# Altium PCB ChronomePCBV2_2.PcbDoc (part 1 of 2)
Units mil, origin at the board's own origin, x right, y up, seen from the top; angles counter-clockwise.
Board outline 8860 x 8860 mil, 2 copper layers (Top Layer, Bottom Layer); 151 components, 169 nets, 789 pads, 304 vias.
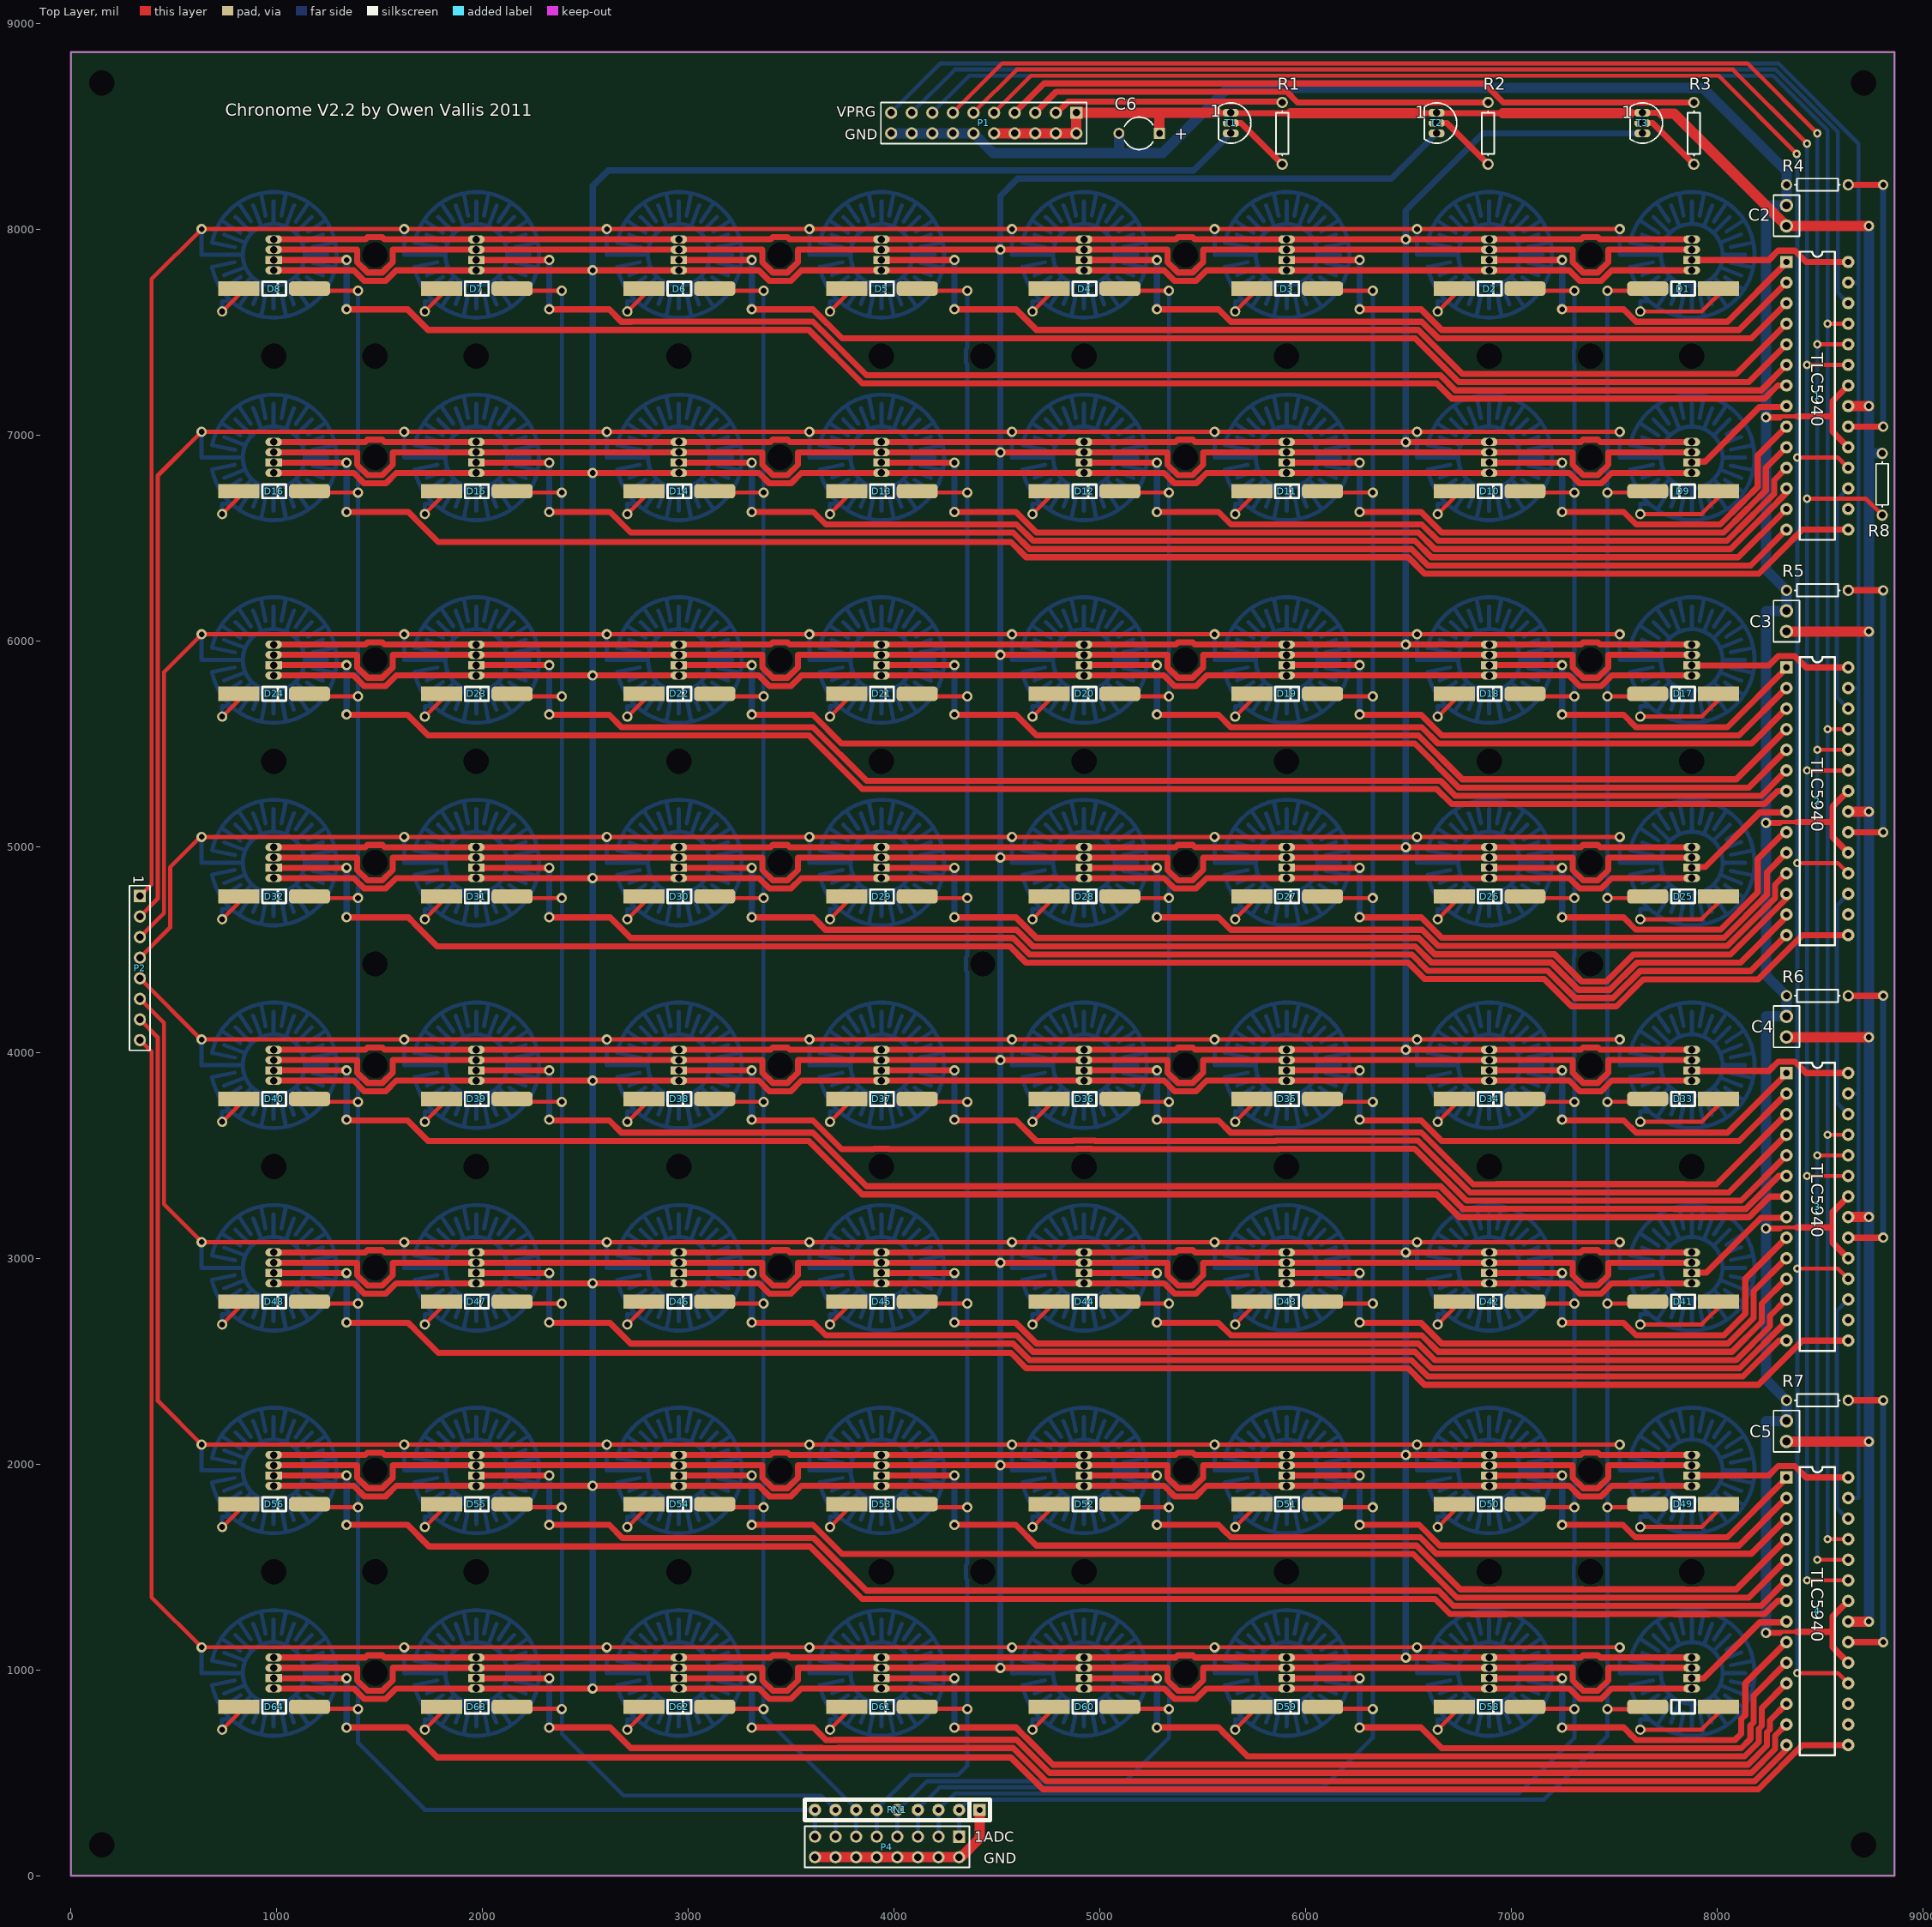
[diagram p0: Top Layer view]
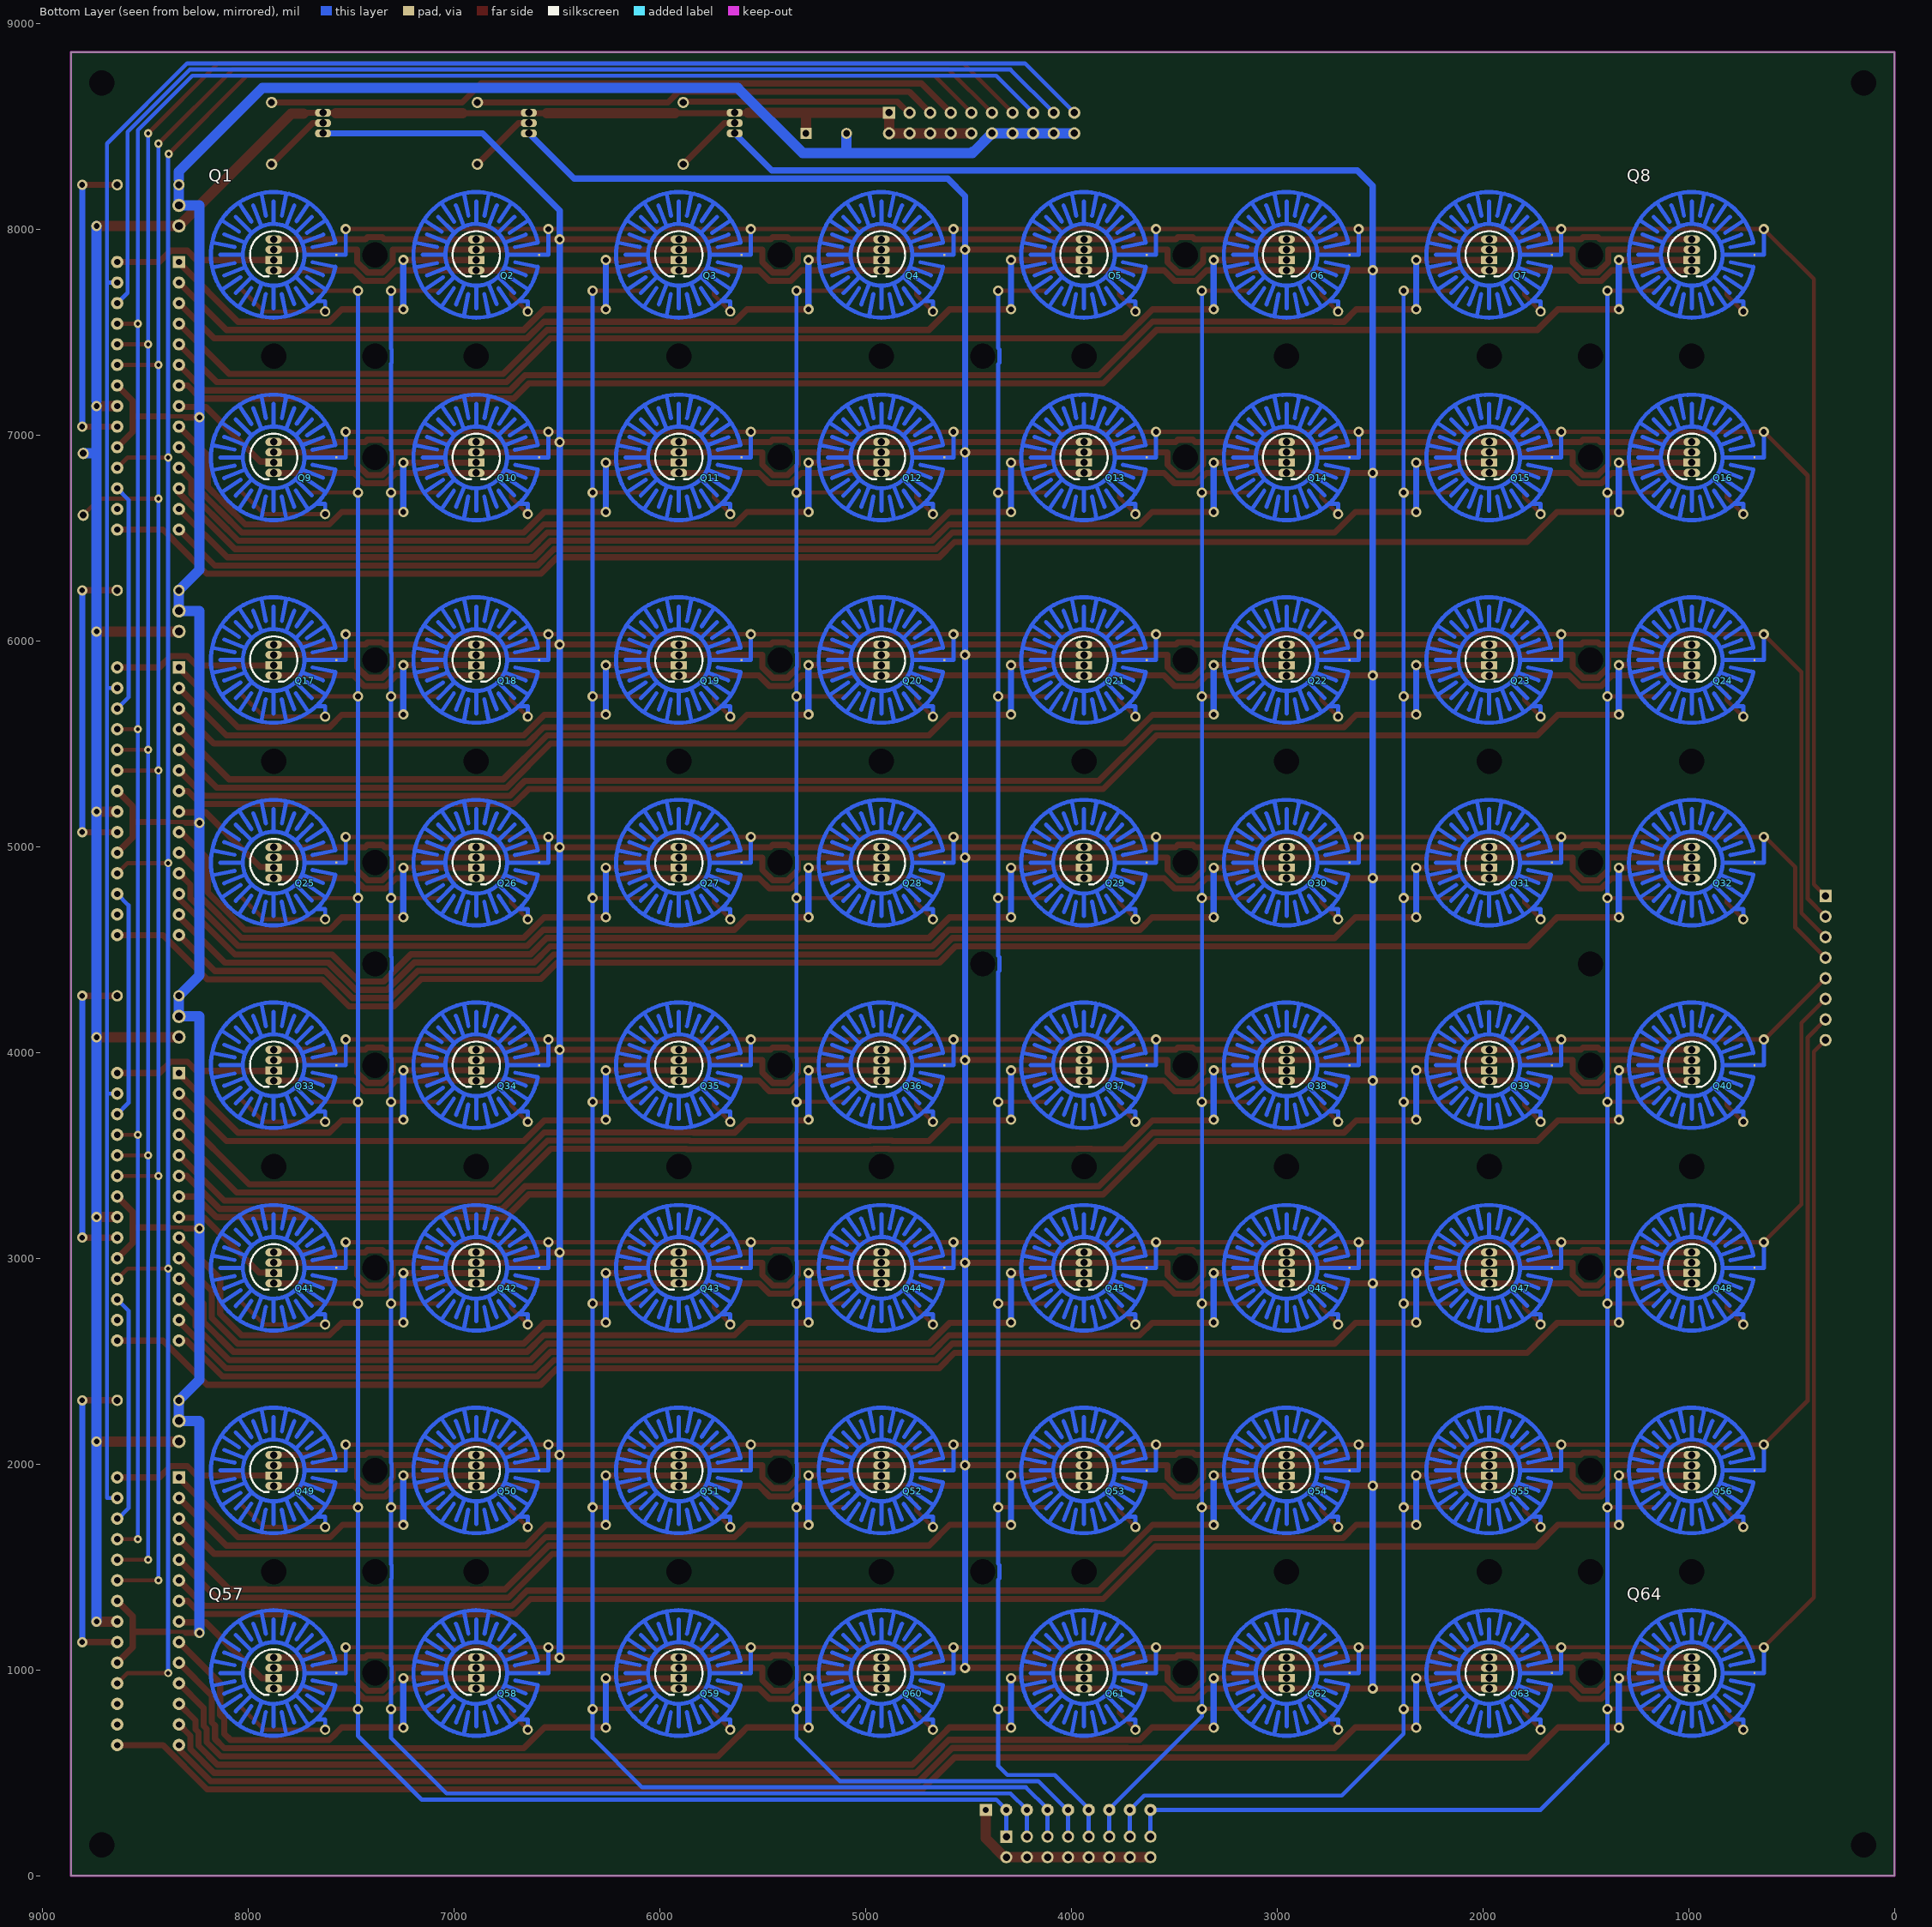
[diagram p1: Bottom Layer view, seen from below]

## Layer stack, top to bottom
Top Layer: signal copper 1.4
Dielectric: dielectric 12.6, FR-4, Dk 4.8
Bottom Layer: signal copper 1.4

## Board outline
0,0 0,8860 8860,8860 8860,0

## Design rules (kind name [scope] priority, off if disabled: settings)
Clearance [All] p1: gap=10
HoleSize [All] p1: absolutevalues=TRUE maxlimit=157.48 minlimit=1 maxpercent=80.000 minpercent=20.000
NetAntennae NetAntennae_PushButton [(HasFootprint('RGB_PUSHBUTTONV3'))] p1: netantennaetolerance=8700
NetAntennae [All] p2: netantennaetolerance=0
PolygonConnect [All] p1: connectstyle=Relief reliefconductorwidth=10 reliefentries=4 polygonreliefangle="90 Angle"
RoutingVias [All] p1: holewidth=32 width=45 viastyle="Through Hole" minholewidth=20 minwidth=40 maxholewidth=28 maxwidth=50
SilkscreenOverComponentPads [All] p1: minsilkscreentomaskgap=10
SolderMaskExpansion [All] p1: expansion=4
Width Width_RGBTraces [(InNet('BLUE') AND InNet('GREEN') AND InNet('RED'))] p1: maxlimit=50 minlimit=20 preferedwidth=25
Width [All] p2: maxlimit=50 minlimit=15 preferedwidth=15
25 further rules are at their usual default settings.

## Components (designator, comment, footprint, x,y, rotation, side; value= is the part's Value field where it differs from the comment)
1 "TLC5940" TLC5940V1 8335.12,7840.12 r0 top
2 "TLC5940" TLC5940V1 8335.12,5870.12 r0 top
3 "TLC5940" TLC5940V1 8335.12,3900.12 r0 top
4 "TLC5940" TLC5940V1 8335.12,1935.12 r0 top
C2 "Cap" CAPR2.54-5.1x3.2 8335.12,8065.12 r90 top
C3 "Cap" CAPR2.54-5.1x3.2 8335.12,6095.12 r90 top
C4 "Cap" CAPR2.54-5.1x3.2 8335.12,4125.12 r90 top
C5 "Cap" CAPR2.54-5.1x3.2 8335.12,2160.12 r90 top
C6 "Cap2" CAPR5-4X5 5190.12,8465.12 r180 top
D1 "DIODE" DIODESM 7835.12,7671.88 r180 top
D2 "DIODE" DIODESM 6890.63,7749.88 r0 top
D3 "DIODE" DIODESM 5906.38,7749.88 r0 top
D4 "DIODE" DIODESM 4922.13,7749.88 r0 top
D5 "DIODE" DIODESM 3937.87,7749.88 r0 top
D6 "DIODE" DIODESM 2953.62,7749.88 r0 top
D7 "DIODE" DIODESM 1969.37,7749.88 r0 top
D8 "DIODE" DIODESM 985.12,7749.88 r0 top
D9 "DIODE" DIODESM 7835.12,6687.63 r180 top
D10 "DIODE" DIODESM 6890.63,6765.63 r0 top
D11 "DIODE" DIODESM 5906.38,6765.63 r0 top
D12 "DIODE" DIODESM 4922.13,6765.63 r0 top
D13 "DIODE" DIODESM 3937.87,6765.63 r0 top
D14 "DIODE" DIODESM 2953.62,6765.63 r0 top
D15 "DIODE" DIODESM 1969.37,6765.63 r0 top
D16 "DIODE" DIODESM 985.12,6765.63 r0 top
D17 "DIODE" DIODESM 7835.12,5703.38 r180 top
D18 "DIODE" DIODESM 6890.63,5781.38 r0 top
D19 "DIODE" DIODESM 5906.38,5781.38 r0 top
D20 "DIODE" DIODESM 4922.13,5781.38 r0 top
D21 "DIODE" DIODESM 3937.87,5781.38 r0 top
D22 "DIODE" DIODESM 2953.62,5781.38 r0 top
D23 "DIODE" DIODESM 1969.37,5781.38 r0 top
D24 "DIODE" DIODESM 985.12,5781.38 r0 top
D25 "DIODE" DIODESM 7835.12,4719.13 r180 top
D26 "DIODE" DIODESM 6890.63,4797.13 r0 top
D27 "DIODE" DIODESM 5906.38,4797.13 r0 top
D28 "DIODE" DIODESM 4922.13,4797.13 r0 top
D29 "DIODE" DIODESM 3937.87,4797.13 r0 top
D30 "DIODE" DIODESM 2953.62,4797.13 r0 top
D31 "DIODE" DIODESM 1969.37,4797.13 r0 top
D32 "DIODE" DIODESM 985.12,4797.13 r0 top
D33 "DIODE" DIODESM 7835.12,3734.87 r180 top
D34 "DIODE" DIODESM 6890.63,3812.87 r0 top
D35 "DIODE" DIODESM 5906.38,3812.87 r0 top
D36 "DIODE" DIODESM 4922.13,3812.87 r0 top
D37 "DIODE" DIODESM 3937.87,3812.87 r0 top
D38 "DIODE" DIODESM 2953.62,3812.87 r0 top
D39 "DIODE" DIODESM 1969.37,3812.87 r0 top
D40 "DIODE" DIODESM 985.12,3812.87 r0 top
D41 "DIODE" DIODESM 7835.12,2750.62 r180 top
D42 "DIODE" DIODESM 6890.63,2828.62 r0 top
D43 "DIODE" DIODESM 5906.38,2828.62 r0 top
D44 "DIODE" DIODESM 4922.13,2828.62 r0 top
D45 "DIODE" DIODESM 3937.87,2828.62 r0 top
D46 "DIODE" DIODESM 2953.62,2828.62 r0 top
D47 "DIODE" DIODESM 1969.37,2828.62 r0 top
D48 "DIODE" DIODESM 985.12,2828.62 r0 top
D49 "DIODE" DIODESM 7835.12,1766.37 r180 top
D50 "DIODE" DIODESM 6890.63,1844.37 r0 top
D51 "DIODE" DIODESM 5906.38,1844.37 r0 top
D52 "DIODE" DIODESM 4922.13,1844.37 r0 top
D53 "DIODE" DIODESM 3937.87,1844.37 r0 top
D54 "DIODE" DIODESM 2953.62,1844.37 r0 top
D55 "DIODE" DIODESM 1969.37,1844.37 r0 top
D56 "DIODE" DIODESM 985.12,1844.37 r0 top
D58 "DIODE" DIODESM 6890.63,860.12 r0 top
D59 "DIODE" DIODESM 5906.38,860.12 r0 top
D60 "DIODE" DIODESM 4922.13,860.12 r0 top
D61 "DIODE" DIODESM 3937.87,860.12 r0 top
D62 "DIODE" DIODESM 2953.62,860.12 r0 top
D63 "DIODE" DIODESM 1969.37,860.12 r0 top
D64 "DIODE" DIODESM 985.12,860.12 r0 top
P1 "Header 10X2A" HDR2X10_CEN 4885.12,8565.12 r180 top
P2 "Header 8" HDR1X8 335.12,4760.12 r270 top
P4 "Header 8X2A" HDR2X8_CEN 4315.12,190.12 r180 top
Q1 "PB-LEDSW" RGB_PUSHBUTTONV3 7874.88,7949.88 r180 bottom
Q2 "PB-LEDSW" RGB_PUSHBUTTONV3 6890.63,7949.88 r180 bottom
Q3 "PB-LEDSW" RGB_PUSHBUTTONV3 5906.38,7949.88 r180 bottom
Q4 "PB-LEDSW" RGB_PUSHBUTTONV3 4922.13,7949.88 r180 bottom
Q5 "PB-LEDSW" RGB_PUSHBUTTONV3 3937.87,7949.88 r180 bottom
Q6 "PB-LEDSW" RGB_PUSHBUTTONV3 2953.62,7949.88 r180 bottom
Q7 "PB-LEDSW" RGB_PUSHBUTTONV3 1969.37,7949.88 r180 bottom
Q8 "PB-LEDSW" RGB_PUSHBUTTONV3 985.12,7949.88 r180 bottom
Q9 "PB-LEDSW" RGB_PUSHBUTTONV3 7874.88,6965.63 r180 bottom
Q10 "PB-LEDSW" RGB_PUSHBUTTONV3 6890.63,6965.63 r180 bottom
Q11 "PB-LEDSW" RGB_PUSHBUTTONV3 5906.38,6965.63 r180 bottom
Q12 "PB-LEDSW" RGB_PUSHBUTTONV3 4922.13,6965.63 r180 bottom
Q13 "PB-LEDSW" RGB_PUSHBUTTONV3 3937.87,6965.63 r180 bottom
Q14 "PB-LEDSW" RGB_PUSHBUTTONV3 2953.62,6965.63 r180 bottom
Q15 "PB-LEDSW" RGB_PUSHBUTTONV3 1969.37,6965.63 r180 bottom
Q16 "PB-LEDSW" RGB_PUSHBUTTONV3 985.12,6965.63 r180 bottom
Q17 "PB-LEDSW" RGB_PUSHBUTTONV3 7874.88,5981.38 r180 bottom
Q18 "PB-LEDSW" RGB_PUSHBUTTONV3 6890.63,5981.38 r180 bottom
Q19 "PB-LEDSW" RGB_PUSHBUTTONV3 5906.38,5981.38 r180 bottom
Q20 "PB-LEDSW" RGB_PUSHBUTTONV3 4922.13,5981.38 r180 bottom
Q21 "PB-LEDSW" RGB_PUSHBUTTONV3 3937.87,5981.38 r180 bottom
Q22 "PB-LEDSW" RGB_PUSHBUTTONV3 2953.62,5981.38 r180 bottom
Q23 "PB-LEDSW" RGB_PUSHBUTTONV3 1969.37,5981.38 r180 bottom
Q24 "PB-LEDSW" RGB_PUSHBUTTONV3 985.12,5981.38 r180 bottom
Q25 "PB-LEDSW" RGB_PUSHBUTTONV3 7874.88,4997.13 r180 bottom
Q26 "PB-LEDSW" RGB_PUSHBUTTONV3 6890.63,4997.13 r180 bottom
Q27 "PB-LEDSW" RGB_PUSHBUTTONV3 5906.38,4997.13 r180 bottom
Q28 "PB-LEDSW" RGB_PUSHBUTTONV3 4922.13,4997.13 r180 bottom
Q29 "PB-LEDSW" RGB_PUSHBUTTONV3 3937.87,4997.13 r180 bottom
Q30 "PB-LEDSW" RGB_PUSHBUTTONV3 2953.62,4997.13 r180 bottom
Q31 "PB-LEDSW" RGB_PUSHBUTTONV3 1969.37,4997.13 r180 bottom
Q32 "PB-LEDSW" RGB_PUSHBUTTONV3 985.12,4997.13 r180 bottom
Q33 "PB-LEDSW" RGB_PUSHBUTTONV3 7874.88,4012.87 r180 bottom
Q34 "PB-LEDSW" RGB_PUSHBUTTONV3 6890.63,4012.87 r180 bottom
Q35 "PB-LEDSW" RGB_PUSHBUTTONV3 5906.38,4012.87 r180 bottom
Q36 "PB-LEDSW" RGB_PUSHBUTTONV3 4922.13,4012.87 r180 bottom
Q37 "PB-LEDSW" RGB_PUSHBUTTONV3 3937.87,4012.87 r180 bottom
Q38 "PB-LEDSW" RGB_PUSHBUTTONV3 2953.62,4012.87 r180 bottom
Q39 "PB-LEDSW" RGB_PUSHBUTTONV3 1969.37,4012.87 r180 bottom
Q40 "PB-LEDSW" RGB_PUSHBUTTONV3 985.12,4012.87 r180 bottom
Q41 "PB-LEDSW" RGB_PUSHBUTTONV3 7874.88,3028.62 r180 bottom
Q42 "PB-LEDSW" RGB_PUSHBUTTONV3 6890.63,3028.62 r180 bottom
Q43 "PB-LEDSW" RGB_PUSHBUTTONV3 5906.38,3028.62 r180 bottom
Q44 "PB-LEDSW" RGB_PUSHBUTTONV3 4922.13,3028.62 r180 bottom
Q45 "PB-LEDSW" RGB_PUSHBUTTONV3 3937.87,3028.62 r180 bottom
Q46 "PB-LEDSW" RGB_PUSHBUTTONV3 2953.62,3028.62 r180 bottom
Q47 "PB-LEDSW" RGB_PUSHBUTTONV3 1969.37,3028.62 r180 bottom
Q48 "PB-LEDSW" RGB_PUSHBUTTONV3 985.12,3028.62 r180 bottom
Q49 "PB-LEDSW" RGB_PUSHBUTTONV3 7874.88,2044.37 r180 bottom
Q50 "PB-LEDSW" RGB_PUSHBUTTONV3 6890.63,2044.37 r180 bottom
Q51 "PB-LEDSW" RGB_PUSHBUTTONV3 5906.38,2044.37 r180 bottom
Q52 "PB-LEDSW" RGB_PUSHBUTTONV3 4922.13,2044.37 r180 bottom
Q53 "PB-LEDSW" RGB_PUSHBUTTONV3 3937.87,2044.37 r180 bottom
Q54 "PB-LEDSW" RGB_PUSHBUTTONV3 2953.62,2044.37 r180 bottom
Q55 "PB-LEDSW" RGB_PUSHBUTTONV3 1969.37,2044.37 r180 bottom
Q56 "PB-LEDSW" RGB_PUSHBUTTONV3 985.12,2044.37 r180 bottom
Q57 "PB-LEDSW" RGB_PUSHBUTTONV3 7874.88,1060.12 r180 bottom
Q58 "PB-LEDSW" RGB_PUSHBUTTONV3 6890.63,1060.12 r180 bottom
Q59 "PB-LEDSW" RGB_PUSHBUTTONV3 5906.38,1060.12 r180 bottom
Q60 "PB-LEDSW" RGB_PUSHBUTTONV3 4922.13,1060.12 r180 bottom
Q61 "PB-LEDSW" RGB_PUSHBUTTONV3 3937.87,1060.12 r180 bottom
Q62 "PB-LEDSW" RGB_PUSHBUTTONV3 2953.62,1060.12 r180 bottom
Q63 "PB-LEDSW" RGB_PUSHBUTTONV3 1969.37,1060.12 r180 bottom
Q64 "PB-LEDSW" RGB_PUSHBUTTONV3 985.12,1060.12 r180 bottom
R1 "Res1" AXIAL-0.3 5885.12,8465.12 r270 top
R2 "Res1" AXIAL-0.3 6885.12,8465.12 r270 top
R3 "Res1" AXIAL-0.3 7885.12,8465.12 r270 top
R4 "Res1" AXIAL-0.3 8485.12,8215.12 r180 top
R5 "Res1" AXIAL-0.3 8485.12,6245.12 r180 top
R6 "Res1" AXIAL-0.3 8485.12,4275.12 r180 top
R7 "Res1" AXIAL-0.3 8485.12,2310.12 r180 top
R8 "Res1" AXIAL-0.3 8800.12,6760.12 r270 top
RN1 "10K" "9-Pin Resistor Network" 4415.12,320.12 r270 top
T1 "PN2907A" TO-92A 5635.12,8515.12 r180 top
T2 "PN2907A" TO-92A 6635.12,8515.12 r180 top
T3 "PN2907A" TO-92A 7635.12,8515.12 r180 top

## Footprints (in the part's own frame and the unit in brackets; to place one, negate y for a bottom-side part, rotate by r counter-clockwise, add the part's x,y. Pads: shape width x height; smd on the part's side, far side on the other; paste and mask are expansions set on the pad)
"9-Pin Resistor Network" [mil] "9-Pin Resistor Network"
  rect 60x60 hole 30: 0(0,0)
  round 60 hole 30: 1(0,-100) 2(0,-200) 3(0,-300) 4(0,-400) 5(0,-500) 6(0,-600) 7(0,-700) 8(0,-800)
  silkscreen extent -50,-850 50,50
AXIAL-0.3 [mm] "Axial Device, Thru-Hole; 2 Leads; 0.3 in Pin Spacing"
  round 1.4 hole 0.85: 1(-3.81,0) 2(3.81,0)
  silkscreen extent -2.77,-0.76 2.77,0.76
CAPR2.54-5.1x3.2 [mm] "Capacitor, Ceramic, Thru-Hole, Dipped Radial; Body 5.1 x 3.2 mm (WxT) Pin Spacing 2.54 mm (typ)"
  round 1.65 hole 1: 1(-1.27,0) 2(1.27,0)
  silkscreen extent -2.55,-1.6 2.55,1.6
CAPR5-4X5 [mm] "Capacitor; 2 Leads"
  rect 1.35x1.35 hole 0.8: 1(-2.5,0)
  round 1.35 hole 0.8: 2(2.5,0)
  silkscreen extent -1.69,-2 1.82,2
DIODESM [mil]
  rect 200x70 smd: 0(-169,-39)
  rrect50% 200x70 smd: 1(174,-39)
  silkscreen extent -55,-72 60,-6
HDR1X8 [mm] "Connector; Header; 8 Position"
  rect 1.5x1.5 hole 0.9: 1(0,0)
  round 1.5 hole 0.9: 2(2.54,0) 3(5.08,0) 4(7.62,0) 5(10.16,0) 6(12.7,0) 7(15.24,0) 8(17.78,0)
  silkscreen extent -1.27,-1.27 19.05,1.27
HDR2X8_CEN [mm] "Connector; Header; 8x2 Position"
  rect 1.5x1.5 hole 0.9: 1(0,0)
  round 1.5 hole 0.9: 2(2.54,0) 3(5.08,0) 4(7.62,0) 5(10.16,0) 6(12.7,0) 7(15.24,0) 8(17.78,0) 9(0,2.54) 10(2.54,2.54) 11(5.08,2.54) 12(7.62,2.54) 13(10.16,2.54) 14(12.7,2.54) 15(15.24,2.54) 16(17.78,2.54)
  silkscreen extent -1.27,-1.27 19.05,3.81
HDR2X10_CEN [mm] "Connector; Header; 10x2 Position"
  rect 1.5x1.5 hole 0.9: 1(0,0)
  round 1.5 hole 0.9: 2(2.54,0) 3(5.08,0) 4(7.62,0) 5(10.16,0) 6(12.7,0) 7(15.24,0) 8(17.78,0) 9(20.32,0) 10(22.86,0) 11(0,2.54) 12(2.54,2.54) 13(5.08,2.54) 14(7.62,2.54) 15(10.16,2.54) 16(12.7,2.54) 17(15.24,2.54) 18(17.78,2.54) 19(20.32,2.54) 20(22.86,2.54)
  silkscreen extent -1.27,-1.27 24.13,3.81
RGB_PUSHBUTTONV3 [mil] "RGB_PushButton"
  oval 80x40 hole 35: 0(0,-150) 2(0,-50) 3(0,0)
  rect 80x40 hole 35: 1(0,-100)
  rect 9.84x9.84 smd mask+0: In(305,-75)
  round 50 hole 30: Out(250,-350)
  Top Layer circle w20: c0,-75 r150
  Top Layer lines w20: 350,50 350,-75 305,-75 150,-75 ; 299.4,-133.16 188.78,-111.16 ; 299.41,-133.1 cw(c0,-75) 299.17,-15.64 188.54,-37.64 ; 251.97,92.06 162.03,31.96 ; 250,-350 250,-300 210,-300 ; 246.92,-239.62 161.6,-182.61 ; 240.62,23.37 140,-15 ; 240.3,-174.23 140,-135 ; 185.46,109.46 110,35 ; 184.93,-260.07 110,-185 ; 169.49,175.34 110.93,87.7 ; 162.59,-318.38 107.84,-236.45 ; 100,165 60,65 ; 99.74,-315.1 60,-215 ; 59.5,215.1 39.6,115.08 ; 58.39,-360.83 39.35,-265.13 ; 0,-335 0,-225 ; 0,185 0,75 ; -37.98,115.4 -57.88,215.42 ; -38.7,-265.26 -57.89,-361.75 ; -57.84,-213.95 -97.76,-315.88 ; -60,65 -99.27,165.28 ; -107.85,86.44 -167.95,176.37 ; -108.6,-235.94 -162.75,-316.99 ; -110,-185 -184.53,-260.53 ; -110,35 -185.07,109.93 ; -140,-135 -240,-175 ; -140,-15 -240.09,24.76 ; -160.85,-183.73 -246.17,-240.73 ; -168.51,37.24 -251.53,92.71 ; -190,-114.98 -290.02,-134.87 ; -190.38,-36.89 -290.4,-17 ; -260,-75 -150,-75 ; 150,-75 cw(c0,-75) 0,-225 ; 150,-75 ccw(c0,-75) 0,75 ; 0,-225 cw(c0,-75) -150,-75 ; 0,75 ccw(c0,-75) -150,-75
  silkscreen extent -115,-180 115,40
TLC5940V1 [mil] "TLC5940V1"
  rect 60x60 hole 30: 1(0,0)
  round 60 hole 30: 2(0,-100) 3(0,-200) 4(0,-300) 5(0,-400) 6(0,-500) 7(0,-600) 8(0,-700) 9(0,-800) 10(0,-900) 11(0,-1000) 12(0,-1100) 13(0,-1200) 14(0,-1300) 15(300,-1300) 16(300,-1200) 17(300,-1100) 18(300,-1000) 19(300,-900) 20(300,-800) 21(300,-700) 22(300,-600) 23(300,-500) 24(300,-400) 25(300,-300) 26(300,-200) 27(300,-100) 28(300,0)
  silkscreen extent 65,-1350 235,50
TO-92A [mm] "TO, Flat Index; 3 In-Line, Axial Leads; Body Dia. 4.5mm; Leads 0.51 x 0.48 mm (max)"
  oval 2x1 hole 0.9: 1(0,-1.27) 2(0,0) 3(0,1.27)
  silkscreen extent -2.48,-2.48 1.5,2.48

## Part data
C2 C3 C4 C5 C6: "Capacitor"
P1: "Header, 10-Pin, Dual row"
P2: "Header, 8-Pin"
P4: "Header, 8-Pin, Dual row"
Q1 Q2 Q3 Q4 Q5 Q6 Q7 Q8 Q9 Q10 Q11 Q12 Q13 Q14 Q15 Q16 Q17 Q18 Q19 Q20 Q21 Q22 Q23 Q24 Q25 Q26 Q27 Q28 Q29 Q30 Q31 Q32 Q33 Q34 Q35 Q36 Q37 Q38 Q39 Q40 Q41 Q42 Q43 Q44 Q45 Q46 Q47 Q48 Q49 Q50 Q51 Q52 Q53 Q54 Q55 Q56 Q57 Q58 Q59 Q60 Q61 Q62 Q63 Q64: library part "Push Button", "Push Button RGB LED"
R1 R2 R3 R4 R5 R6 R7 R8: "Resistor"
RN1: library part Res1
T1 T2 T3: "PNP General Purpose Amplifier"

## Free pads (board coordinates)
  round 0 hole 122.05: 0(985.12,3445.75) 0(985.12,5414.25) 0(985.12,7382.76) 0(1477.24,985.12) 0(1477.24,1969.37) 0(1477.24,2953.62) 0(1477.24,3937.87) 0(1477.24,4922.13) 0(1477.24,5906.38) 0(1477.24,6890.63) 0(1477.24,7874.88) 1(150,150) 1(150,8710) 1(985.12,1477.24) 1(1969.37,1477.24) 1(1969.37,3445.75) 1(1969.37,5414.25) 1(1969.37,7382.76) 1(2953.62,1477.12) 1(3445.75,985.12) 1(3445.75,1969.37) 1(3445.75,2953.62) 1(3445.75,3937.87) 1(3445.75,4922.13) 1(3445.75,5906.38) 1(3445.75,6890.63) 1(3445.75,7874.88) 1(8710,150) 1(8710,8710) 2(1477.24,1477.24) 2(1477.24,4430) 2(1477.24,7382.76) 2(2953.62,3445.75) 2(2953.62,5414.25) 2(2953.62,7382.76) 2(4922.13,1477.12) 2(4922.13,3445.62) 2(4922.13,5414.13) 2(4922.13,7382.63) 2(5414.25,985.12) 2(5414.25,1969.37) 2(5414.25,2953.62) 2(5414.25,3937.87) 2(5414.25,4922.13) 2(5414.25,5906.38) 2(5414.25,6890.63) 2(5414.25,7874.88) 3(3937.87,1477.24) 3(3937.87,3445.75) 3(3937.87,5414.25) 3(3937.87,7382.76) 3(4430,1477.24) 3(4430,4430) 3(4430,7382.76) 3(6890.63,1477.12) 3(6890.63,3445.62) 3(6890.63,5414.13) 3(6890.63,7382.63) 3(7382.76,985.12) 3(7382.76,1969.37) 3(7382.76,2953.62) 3(7382.76,3937.87) 3(7382.76,4922.13) 3(7382.76,5906.38) 3(7382.76,6890.63) 3(7382.76,7874.88) 4(7382.76,1477.24) 4(7382.76,4430) 4(7382.76,7382.76) 5(5906.38,1477.24) 5(5906.38,3445.75) 5(5906.38,5414.25) 5(5906.38,7382.76) 7(7874.88,1477.24) 7(7874.88,3445.75) 7(7874.88,5414.25) 7(7874.88,7382.76)
  rect 200x70 smd: 0(8004.12,821.12)
  rrect50% 200x70 smd: 1(7661.12,821.12)

## Via types
v1: diameter 50, hole 28, Top Layer to Bottom Layer, 284 vias
v2: diameter 40, hole 20, Top Layer to Bottom Layer, 20 vias

## Nets (pads, with @x,y where several pads share a name; then routed paths per layer and width w, separated by ;. In a path a pad name is that pad's centre, name@x,y a point inside that pad or via, vN(x,y) a via of type N, cw(c..) or ccw(c..) an arc to the next point about the centre after c; other vN are vias at no path point)
BLANK: 1.23 2.23 3.23 4.23 P1.6 R8.2 | length 12460.1
  Top Layer w20: P1.6@4385.12,8565.12 4595.12,8775.12 8075.12,8775.12 v2(8435.12,8415.12) ; v2(8435.12,1435.12) 4.23@8635.12,1435.12 ; v2(8435.12,3400.12) 3.23@8635.12,3400.12 ; v2(8435.12,5370.12) 2.23@8635.12,5370.12 ; v2(8435.12,6690.12) 8720.12,6690.12 8790.12,6620.12 R8.2@8790.12,6610.12 ; v2(8435.12,7340.12) 1.23@8635.12,7340.12
  Bottom Layer w20: v2(8435.12,1435.12) v2(8435.12,8415.12)
BLUE: P1.3 R2.1 | length 2264.3
  Top Layer w30: P1.3@4685.12,8565.12 4787.68,8667.68 5906.89,8667.68 5959.45,8615.12 R2.1@6885.12,8615.12
COL1: D1.1 D9.1 D17.1 D25.1 D33.1 D41.1 D49.1 P4.1 pad.1@7661.12,821.12 RN1.1 | length 12319.2
  Top Layer w20: v1@7470.12,810.12 pad.1@7705.12,810.12 ; v1@7470.12,1790.12 D49.1@7705.12,1790.12 ; v1@7470.12,2780.12 D41.1@7705.12,2780.12 ; v1@7470.12,3760.12 D33.1@7705.12,3760.12 ; v1@7470.12,4750.12 D25.1@7705.12,4750.12 ; v1@7470.12,5730.12 D17.1@7705.12,5730.12 ; v1@7470.12,6720.12 D9.1@7705.12,6720.12 ; v1@7470.12,7700.12 D1.1@7705.12,7700.12
  Bottom Layer w20: P4.1@4315.12,190.12 RN1.1@4315.12,320.12 4365.12,370.12 4453.4,370.12 4453.52,370 7155,370 7465.12,680.12 v1(7465.12,810.12) ; v1@7465.12,820.12 v1(7465.12,1790.12) v1(7465.12,2780.12) v1(7465.12,3760.12) v1(7465.12,4750.12) v1(7465.12,5730.12) v1(7465.12,6720.12) v1(7465.12,7700.12)
COL2: D2.1 D10.1 D18.1 D26.1 D34.1 D42.1 D50.1 D58.1 P4.2 RN1.2 | length 12293.1
  Top Layer w20: D50.1@7065.12,1790.12 v1@7300.12,1790.12 ; D42.1@7065.12,2780.12 v1@7300.12,2780.12 ; D34.1@7065.12,3760.12 v1@7300.12,3760.12 ; D26.1@7065.12,4750.12 v1@7300.12,4750.12 ; D18.1@7065.12,5730.12 v1@7300.12,5730.12 ; D10.1@7065.12,6720.12 v1@7300.12,6720.12 ; D2.1@7065.12,7700.12 v1@7300.12,7700.12 ; D58.1@7069.12,811.12 v1@7304.12,811.12
  Bottom Layer w20: P4.2@4215.12,190.12 RN1.2@4215.12,320.12 4295,400 4347.28,400 4347.39,400.12 4465.83,400.12 4465.94,400 7035,400 7305.12,670.12 v1(7305.12,810.12) ; v1@7305.12,820.12 7305.12,948.17 7301.73,951.56 7301.73,1018.68 7305.12,1022.06 7305.12,1440.3 7301.73,1443.68 7301.73,1510.8 7305.12,1514.19 v1(7305.12,1790.12) 7305.12,1932.42 7301.73,1935.81 7301.73,2002.93 7305.12,2006.32 v1(7305.12,2780.12) 7305.12,2916.68 7301.73,2920.06 7301.73,2987.18 7305.12,2990.57 v1(7305.12,3760.12) 7305.12,3900.93 7301.73,3904.31 7301.73,3971.43 7305.12,3974.82 7305.12,4393.05 7301.73,4396.44 7301.73,4463.56 7305.12,4466.95 v1(7305.12,4750.12) 7305.12,4885.18 7301.73,4888.56 7301.73,4955.69 7305.12,4959.07 v1(7305.12,5730.12) 7305.12,5869.43 7301.73,5872.82 7301.73,5939.94 7305.12,5943.32 v1(7305.12,6720.12) 7305.12,6853.68 7301.73,6857.07 7301.73,6924.19 7305.12,6927.58 7305.12,7345.81 7301.73,7349.19 7301.73,7416.32 7305.12,7419.7 v1(7305.12,7700.12)
COL3: D3.1 D11.1 D19.1 D27.1 D35.1 D43.1 D51.1 D59.1 P4.3 RN1.3 | length 11398
  Top Layer w20: D51.1@6085.12,1790.12 v1@6320.12,1790.12 ; D43.1@6085.12,2780.12 v1@6320.12,2780.12 ; D35.1@6085.12,3760.12 v1@6320.12,3760.12 ; D27.1@6085.12,4750.12 v1@6320.12,4750.12 ; D19.1@6085.12,5730.12 v1@6320.12,5730.12 ; D11.1@6085.12,6720.12 v1@6320.12,6720.12 ; D3.1@6085.12,7700.12 v1@6320.12,7700.12 ; D59.1@6089.12,811.12 v1@6324.12,811.12
  Bottom Layer w20: P4.3@4115.12,190.12 RN1.3@4115.12,320.12 ; RN1.3@4125.12,320.12 RN1.3@4115.12,320.12 ; v1(6325.12,810.12) 6325.12,670.12 6085,430 4478.37,430 4478.25,430.12 4334.97,430.12 4334.85,430 4220,430 4115.12,325.12 RN1.3@4115.12,320.12 ; v1@6325.12,820.12 v1(6325.12,1790.12) v1(6325.12,2780.12) v1(6325.12,3760.12) v1(6325.12,4750.12) v1(6325.12,5730.12) v1(6325.12,6720.12) v1(6325.12,7700.12)
COL4: D4.1 D12.1 D20.1 D28.1 D36.1 D44.1 D52.1 D60.1 P4.4 RN1.4 | length 10510
  Top Layer w20: D52.1@5095.12,1790.12 v1@5330.12,1790.12 ; D44.1@5095.12,2780.12 v1@5330.12,2780.12 ; D36.1@5095.12,3760.12 v1@5330.12,3760.12 ; D28.1@5095.12,4750.12 v1@5330.12,4750.12 ; D20.1@5095.12,5730.12 v1@5330.12,5730.12 ; D12.1@5095.12,6720.12 v1@5330.12,6720.12 ; D4.1@5095.12,7700.12 v1@5330.12,7700.12 ; D60.1@5099.12,811.12 v1@5334.12,811.12
  Bottom Layer w20: RN1.4@4015,335 4035,335 4160,460 4322.43,460 4322.54,460.12 4490.68,460.12 4490.8,460 5125,460 5335.12,670.12 v1(5335.12,810.12) 5335.12,949.67 5333.23,951.56 5333.23,1018.68 5335.12,1020.57 v1(5335.12,1790.12) 5335.12,1933.92 5333.23,1935.81 5333.23,2002.93 5335.12,2004.82 v1(5335.12,2780.12) 5335.12,2918.17 5333.23,2920.06 5333.23,2987.18 5335.12,2989.07 v1(5335.12,3760.12) 5335.12,3902.42 5333.23,3904.31 5333.23,3971.43 5335.12,3973.32 v1(5335.12,4750.12) 5335.12,4886.68 5333.23,4888.56 5333.23,4955.69 5335.12,4957.58 v1(5335.12,5730.12) 5335.12,5870.93 5333.23,5872.82 5333.23,5939.94 5335.12,5941.83 v1(5335.12,6720.12) 5335.12,6855.18 5333.23,6857.07 5333.23,6924.19 5335.12,6926.08 v1(5335.12,7700.12) ; P4.4@4015.12,190.12 RN1.4@4015.12,320.12
COL5: D5.1 D13.1 D21.1 D29.1 D37.1 D45.1 D53.1 D61.1 P4.5 RN1.5 | length 9723.7
  Top Layer w20: D53.1@4115.12,1790.12 v1@4350.12,1790.12 ; D45.1@4115.12,2780.12 v1@4350.12,2780.12 ; D37.1@4115.12,3760.12 v1@4350.12,3760.12 ; D29.1@4115.12,4750.12 v1@4350.12,4750.12 ; D21.1@4115.12,5730.12 v1@4350.12,5730.12 ; D13.1@4115.12,6720.12 v1@4350.12,6720.12 ; D5.1@4115.12,7700.12 v1@4350.12,7700.12 ; D61.1@4119.12,811.12 v1@4354.12,811.12
  Bottom Layer w20: P4.5@3915.12,190.12 3915.12,325.12 4080,490 4310,490 4355.12,535.12 v1@4355.12,805.12 ; v1(4355.12,7700.12) 4355.12,7422.46 4348.98,7416.32 4348.98,7349.19 4355.12,7343.05 v1(4355.12,6720.12) v1(4355.12,5730.12) v1(4355.12,4750.12) 4355.12,4469.7 4348.98,4463.56 4348.98,4396.44 4355.12,4390.3 v1(4355.12,3760.12) v1(4355.12,2780.12) v1(4355.12,1790.12) 4355.12,1516.95 4348.98,1510.8 4348.98,1443.68 4355.12,1437.54 v1(4355.12,810.12) v1@4355.12,805.12 ; v1@4356.12,804.12 v1@4355.12,805.12
COL6: D6.1 D14.1 D22.1 D30.1 D38.1 D46.1 D54.1 D62.1 P4.6 RN1.6 | length 9569.3
  Top Layer w20: D54.1@3125.12,1790.12 v1@3360.12,1790.12 ; D46.1@3125.12,2780.12 v1(3364.72,2780.12) ; D38.1@3127.62,3760.12 v1@3360.12,3760.12 ; D30.1@3127.62,4750.12 v1@3360.12,4750.12 ; D22.1@3127.62,5730.12 v1@3360.12,5730.12 ; D14.1@3127.62,6720.12 v1@3360.12,6720.12 ; D6.1@3127.62,7700.12 v1@3360.12,7700.12 ; D62.1@3129.12,811.12 v1@3364.72,811.12
  Bottom Layer w20: v1@3364.72,7700.12 v1(3364.72,2780.12) v1(3364.72,810.12) 3364.72,775.28 3815.12,324.88 P4.6@3815.12,190.12
  other v1: 3365.12,1790.12 3365.12,3760.12 3365.12,4750.12 3365.12,5730.12 3365.12,6720.12 3365.12,7700.12
COL7: D7.1 D15.1 D23.1 D31.1 D39.1 D47.1 D55.1 D63.1 P4.7 RN1.7 | length 10503.3
  Top Layer w20: D55.1@2145.12,1790.12 v1@2380.12,1790.12 ; D47.1@2145.12,2780.12 v1@2380.12,2780.12 ; D39.1@2145.12,3760.12 v1@2380.12,3760.12 ; D31.1@2145.12,4750.12 v1@2380.12,4750.12 ; D23.1@2145.12,5730.12 v1@2380.12,5730.12 ; D15.1@2145.12,6720.12 v1@2380.12,6720.12 ; D7.1@2145.12,7700.12 v1@2380.12,7700.12 ; D63.1@2149.12,811.12 v1@2384.12,811.12
  Bottom Layer w20: v1(2385.12,7700.12) v1(2385.12,6720.12) v1(2385.12,5730.12) v1(2385.12,4750.12) v1(2385.12,3760.12) v1(2385.12,2780.12) v1(2385.12,1790.12) v1(2385.12,810.12) 2385.12,690.12 2685.23,390 3645.23,390 RN1.7@3715.12,320.12 P4.7@3715.12,190.12
COL8: D8.1 D16.1 D24.1 D32.1 D40.1 D48.1 D56.1 D64.1 P4.8 RN1.8 | length 11391.6
  Top Layer w20: D64.1@1159.12,811.12 v1@1394.12,811.12 ; D56.1@1159.12,1790.12 v1@1390.12,1790.12 ; D48.1@1159.12,2780.12 v1@1390.12,2780.12 ; D40.1@1159.12,3760.12 v1@1390.12,3760.12 ; D32.1@1159.12,4750.12 v1@1390.12,4750.12 ; D24.1@1159.12,5730.12 v1@1390.12,5730.12 ; D16.1@1159.12,6720.12 v1@1390.12,6720.12 ; D8.1@1159.12,7700.12 v1@1390.12,7700.12
  Bottom Layer w20: v1(1395.12,7700.12) v1(1395.12,6720.12) v1(1395.12,5730.12) v1(1395.12,4750.12) v1(1395.12,3760.12) v1(1395.12,2780.12) v1(1395.12,1790.12) v1(1395.12,810.12) 1395.12,645.12 1720.23,320 3615.12,320 P4.8@3615.12,190.12
GND: 1.19 1.22 2.19 2.22 3.19 3.22 4.19 4.22 C2.2 C3.2 C4.2 C5.2 C6.2 P1.16 P1.17 P1.18 P1.19 P1.20 R4.2 R5.2 R6.2 R7.2 | length 15107
  Top Layer w20: 8302.34,7085.12 8307.34,7090.12 8385.12,7090.12 ; 8307.34,1185.12 8385.12,1185.12 ; 8307.34,3150.12 8385.12,3150.12 ; 8307.34,5120.12 8385.12,5120.12
  Top Layer w30: v1(8235.12,1180.12) 8302.34,1180.12 ; v1(8235.12,3145.12) 8302.34,3145.12 ; v1(8235.12,5115.12) 8302.34,5115.12 ; v1(8235.12,7085.12) 8302.34,7085.12 ; 8385.12,1185.12 8560.12,1185.12 ; 8385.12,3150.12 8560.12,3150.12 ; 8385.12,5120.12 8560.12,5120.12 ; 8385.12,7090.12 8560.12,7090.12 ; 4.19@8635.12,1035.12 8560.12,1110.12 8560.12,1185.12 ; 4.22@8635.12,1335.12 8560.12,1260.12 8560.12,1185.12 ; 3.19@8635.12,3000.12 8560.12,3075.12 8560.12,3150.12 ; 3.22@8635.12,3300.12 8560.12,3225.12 8560.12,3150.12 ; 2.19@8635.12,4970.12 8560.12,5045.12 8560.12,5120.12 ; 2.22@8635.12,5270.12 8560.12,5195.12 8560.12,5120.12 ; 1.19@8635.12,6940.12 8560.12,7015.12 8560.12,7090.12 ; 1.22@8635.12,7240.12 8560.12,7165.12 8560.12,7090.12
  Bottom Layer w50: P1.20@3985.12,8465.12 P1.19@4085.12,8465.12 P1.18@4185.12,8465.12 P1.17@4285.12,8465.12 P1.16@4385.12,8465.12 4475.12,8375.12 4480.12,8375.12 ; 4480.12,8370.12 5305.12,8370.12 5620.12,8685.12 7930.12,8685.12 8335.12,8280.12 R4.2@8335.12,8240.12 ; 5091.69,8378.54 C6.2@5091.69,8465.12 ; v1(8235.12,1180.12) 8235.12,2210.12 C5.2@8335.12,2210.12 R7.2@8335.12,2310.12 8235.12,2410.12 8235.12,4175.12 C4.2@8335.12,4175.12 R6.2@8335.12,4275.12 8235.12,4375.12 8235.12,6145.12 C3.2@8335.12,6145.12 R5.2@8335.12,6245.12 8235.12,6345.12 v1(8235.12,7085.12) 8235.12,8115.12 C2.2@8335.12,8115.12 R4.2@8335.12,8215.12
GNDADC: P4.9 P4.10 P4.11 P4.12 P4.13 P4.14 P4.15 P4.16 RN1.0 | length 976.4
  Top Layer w50: P4.16@3615.12,90.12 P4.15@3715.12,90.12 P4.14@3815.12,90.12 P4.13@3915.12,90.12 P4.12@4015.12,90.12 P4.11@4115.12,90.12 P4.10@4215.12,90.12 P4.9@4315.12,90.12 4323.67,90.11 4415.12,181.57 RN1.0@4415.12,320.12
GREEN: P1.4 R3.1 | length 3397.4
  Top Layer w30: P1.4@4585.12,8565.12 4727.68,8707.68 6866.89,8707.68 6959.45,8615.12 R3.1@7885.12,8615.12
GSCLK: 1.18 2.18 3.18 4.18 P1.5 | length 12591.3
  Top Layer w20: P1.5@4480.12,8570.12 4490.12,8570.12 4665.12,8745.12 8005.12,8745.12 v2(8385.12,8365.12) ; v2(8387.6,985.12) 8585.12,985.12 4.18@8635.12,935.12 ; v2(8387.6,2950.12) 8585.12,2950.12 3.18@8635.12,2900.12 ; v2(8387.6,4920.12) 8585.12,4920.12 2.18@8635.12,4870.12 ; v2(8387.6,6890.12) 8585.12,6890.12 1.18@8635.12,6840.12
  Bottom Layer w20: v2(8385.12,8365.12) v2@8387.6,8362.64 ; v2(8387.6,985.12) v2@8387.6,8365.12
"LED GND 1": 1.28 Q1.1 | length 801.8
  Top Layer w30: Q1.1@7874.88,7849.88 8249.53,7849.88 8294.76,7895.12 8375.47,7895.12 8430.47,7840.12 1.28@8635.12,7840.12
"LED GND 2": 1.1 Q2.1 | length 1831.2
  Top Layer w30: Q2.1@6890.63,7849.88 v1(7245.12,7849.88) ; v1(7245.12,7610.12) 7543.93,7610.12 7604.17,7549.88 8047.99,7549.88 8335.12,7837.01 1.1@8335.12,7840.12
  Bottom Layer w30: v1(7245.12,7610.12) v1(7245.12,7849.88)
"LED GND 3": 1.2 Q3.1 | length 2805.4
  Top Layer w30: Q3.1@5906.38,7849.88 v1(6260.87,7849.88) ; v1(6260.87,7610.12) 6559.68,7610.12 6659.92,7509.88 8104.88,7509.88 1.2@8335.12,7740.12
  Bottom Layer w30: v1(6260.87,7610.12) v1(6260.87,7849.88)
"LED GND 4": 1.3 Q4.1 | length 3781.4
  Top Layer w30: Q4.1@4922.13,7849.88 v1(5276.61,7849.88) ; v1(5276.61,7610.12) 5575.43,7610.12 5635.67,7549.88 6563.35,7549.88 6643.35,7469.88 8164.88,7469.88 1.3@8335.12,7640.12
  Bottom Layer w30: v1(5276.61,7610.12) v1(5276.61,7849.88)
"LED GND 5": 1.4 Q5.1 | length 4867.7
  Top Layer w30: Q5.1@3937.87,7849.88 v1(4292.36,7849.88) ; v1(4292.36,7610.12) 4591.18,7610.12 4691.42,7509.88 6546.78,7509.88 6760.06,7296.61 8091.61,7296.61 1.4@8335.12,7540.12
  Bottom Layer w30: v1(4292.36,7610.12) v1(4292.36,7849.88)
"LED GND 6": 1.5 Q6.1 | length 5843.7
  Top Layer w30: Q6.1@2953.62,7849.88 v1(3308.11,7849.88) ; v1(3308.11,7610.12) 3605.12,7610.12 3746.46,7468.78 6531.32,7468.78 6743.49,7256.61 8151.61,7256.61 1.5@8335.12,7440.12
  Bottom Layer w30: v1(3308.11,7610.12) v1(3308.11,7849.88)
"LED GND 7": 1.6 Q7.1 | length 6819.9
  Top Layer w30: Q7.1@1969.37,7849.88 v1(2323.86,7849.88) ; v1(2323.86,7610.12) 2615.12,7610.12 2675.35,7549.88 2724.33,7549.88 2724.57,7550.12 3605.12,7550.12 3865.12,7290.12 6653.41,7290.12 6726.92,7216.61 8211.61,7216.61 1.6@8335.12,7340.12
  Bottom Layer w30: v1(2323.86,7610.12) v1(2323.86,7849.88)
"LED GND 8": 1.7 Q8.1 | length 7795.8
  Top Layer w30: Q8.1@985.12,7849.88 v1(1339.61,7849.88) ; v1(1339.61,7610.12) 1635.12,7610.12 1735.35,7509.88 2740.9,7509.88 2741.14,7510.12 3585.12,7510.12 3845.12,7250.12 6635.12,7250.12 6708.63,7176.61 8228.17,7176.61 8291.69,7240.12 1.7@8335.12,7240.12
  Bottom Layer w30: v1(1339.61,7610.12) v1(1339.61,7849.88)
"LED GND 9": 1.8 Q9.1 | length 573.9
  Top Layer w30: Q9.1@7874.88,6865.63 7879.88,6870.63 7939.88,6870.63 8205.86,7136.61 8331.61,7136.61 1.8@8335.12,7140.12
"LED GND 10": 1.9 Q10.1 | length 1995.3
  Top Layer w30: Q10.1@6890.63,6865.63 v1(7245.12,6865.63) ; v1(7245.12,6625.87) 7543.93,6625.87 7604.17,6565.63 8013.14,6565.63 8114.14,6666.63 8114.47,6666.63 8129.12,6681.27 8129.12,6681.6 8195.12,6747.61 8195.12,6900.12 1.9@8335.12,7040.12
  Bottom Layer w30: v1(7245.12,6625.87) v1(7245.12,6865.63)
"LED GND 11": 1.10 Q11.1 | length 2945.8
  Top Layer w30: Q11.1@5906.38,6865.63 v1(6260.87,6865.63) ; v1(6260.87,6625.87) 6559.68,6625.87 6659.92,6525.63 8029.71,6525.63 8130.71,6626.63 8131.04,6626.63 8169.12,6664.71 8169.12,6665.04 8235.12,6731.04 8235.12,6840.12 1.10@8335.12,6940.12
  Bottom Layer w30: v1(6260.87,6625.87) v1(6260.87,6865.63)
"LED GND 12": 1.11 Q12.1 | length 3896.3
  Top Layer w30: Q12.1@4922.13,6865.63 v1(5276.61,6865.63) ; v1(5276.61,6625.87) 5575.43,6625.87 5635.67,6565.63 6563.35,6565.63 6643.35,6485.63 8046.28,6485.63 8147.28,6586.63 8147.61,6586.63 8209.12,6648.14 8209.12,6648.47 8275.12,6714.47 8275.12,6780.12 1.11@8335.12,6840.12
  Bottom Layer w30: v1(5276.61,6625.87) v1(5276.61,6865.63)
"LED GND 13": 1.12 Q13.1 | length 4846.9
  Top Layer w30: Q13.1@3937.87,6865.63 v1(4292.36,6865.63) ; v1(4292.36,6625.87) 4591.18,6625.87 4691.42,6525.63 6546.78,6525.63 6626.78,6445.63 8062.85,6445.63 8163.85,6546.63 8164.18,6546.63 8249.12,6631.57 8249.12,6631.9 8335.12,6717.9 1.12@8335.12,6740.12
  Bottom Layer w30: v1(4292.36,6625.87) v1(4292.36,6865.63)
"LED GND 14": 1.13 Q14.1 | length 5815.5
  Top Layer w30: Q14.1@2953.62,6865.63 v1(3308.11,6865.63) ; v1(3308.11,6625.87) 3606.93,6625.87 3667.16,6565.63 4594.85,6565.63 4674.85,6485.63 6530.21,6485.63 6610.21,6405.63 8100.63,6405.63 8325.12,6630.12 1.13@8345.12,6630.12
  Bottom Layer w30: v1(3308.11,6625.87) v1(3308.11,6865.63)
"LED GND 15": 1.14 Q15.1 | length 6785.6
  Top Layer w30: Q15.1@1969.37,6865.63 v1(2323.86,6865.63) ; v1(2323.86,6625.87) 2619.37,6625.87 2719.61,6525.63 4578.28,6525.63 4658.28,6445.63 6513.65,6445.63 6593.65,6365.63 8160.63,6365.63 1.14@8335.12,6540.12
  Bottom Layer w30: v1(2323.86,6625.87) v1(2323.86,6865.63)
"LED GND 16": 1.15 Q16.1 | length 8104.5
  Top Layer w30: Q16.1@985.12,6865.63 v1(1339.61,6865.63) ; v1(1339.61,6625.87) 1639.37,6625.87 1669.37,6595.87 1669.37,6594.92 1784.17,6480.12 4567.22,6480.12 4641.71,6405.63 6497.08,6405.63 6577.08,6325.63 8200.04,6325.63 8360.12,6485.71 8360.12,6487.34 8412.9,6540.12 1.15@8635.12,6540.12
  Bottom Layer w30: v1(1339.61,6625.87) v1(1339.61,6865.63)
"LED GND 17": 2.28 Q17.1 | length 801.8
  Top Layer w30: Q17.1@7874.88,5879.88 8249.53,5879.88 8294.76,5925.12 8375.47,5925.12 8430.47,5870.12 2.28@8635.12,5870.12
"LED GND 18": 2.1 Q18.1 | length 1829.7
  Top Layer w30: Q18.1@6890.63,5881.38 v1(7245.12,5881.38) ; v1@7245.12,5640.12 7543.93,5640.12 7603.93,5580.12 7805.96,5580.12 7806.11,5580.28 7943.65,5580.28 7943.81,5580.12 8048.22,5580.12 2.1@8335.12,5867.01 ; 2.1@8335.12,5868.51 2.1@8335.12,5870.12
  Bottom Layer w30: v1(7245.12,5641.61) v1(7245.12,5881.38)
"LED GND 19": 2.2 Q19.1 | length 2805.4
  Top Layer w30: Q19.1@5906.38,5881.38 v1(6260.87,5881.38) ; v1@6260.87,5640.12 6559.68,5640.12 6659.68,5540.12 6838.4,5540.12 ; 6838.43,5540.15 6942.83,5540.15 ; 6942.86,5540.12 7822.52,5540.12 7822.68,5540.28 7927.08,5540.28 7927.24,5540.12 8105.12,5540.12 2.2@8335.12,5770.12
  Bottom Layer w30: v1(6260.87,5641.61) v1(6260.87,5881.38)
"LED GND 20": 2.3 Q20.1 | length 3781.4
  Top Layer w30: Q20.1@4922.13,5881.38 v1(5276.61,5881.38) ; v1@5276.61,5640.12 5575.43,5640.12 5635.43,5580.12 5837.45,5580.12 5837.61,5580.28 6562.96,5580.28 6643.11,5500.12 6854.97,5500.12 ; 6855,5500.15 6926.26,5500.15 ; 6926.29,5500.12 7839.09,5500.12 7839.25,5500.28 7910.51,5500.28 7910.67,5500.12 8165.12,5500.12 2.3@8335.12,5670.12
  Bottom Layer w30: v1(5276.61,5641.61) v1(5276.61,5881.38)
"LED GND 21": 2.4 Q21.1 | length 4867.9
  Top Layer w30: Q21.1@3937.87,5881.38 v1(4292.36,5881.38) ; v1@4292.36,5640.12 4591.18,5640.12 4691.18,5540.12 4869.89,5540.12 ; 4869.93,5540.15 4974.33,5540.15 ; 4974.36,5540.12 5854.02,5540.12 5854.18,5540.28 6546.39,5540.28 6760.06,5326.61 8091.61,5326.61 2.4@8335.12,5570.12
  Bottom Layer w30: v1(4292.36,5641.61) v1(4292.36,5881.38)
"LED GND 22": 2.5 Q22.1 | length 5844
  Top Layer w30: Q22.1@2953.62,5881.38 v1(3308.11,5881.38) ; v1@3308.11,5640.12 3605.12,5640.12 3745.12,5500.12 3902.08,5500.12 3902.24,5500.28 3973.51,5500.28 3973.66,5500.12 4886.46,5500.12 ; 4886.49,5500.15 4957.76,5500.15 ; 4957.79,5500.12 5870.59,5500.12 5870.75,5500.28 6529.82,5500.28 6743.49,5286.61 8151.61,5286.61 2.5@8335.12,5470.12
  Bottom Layer w30: v1(3308.11,5641.61) v1(3308.11,5881.38)
"LED GND 23": 2.6 Q23.1 | length 6819.5
  Top Layer w30: Q23.1@1969.37,5881.38 v1(2323.86,5881.38) ; v1@2323.86,5640.12 2615.12,5640.12 2675.35,5579.88 2724.33,5579.88 ; 2724.57,5580.12 3605.12,5580.12 3865.12,5320.12 6653.41,5320.12 6726.92,5246.61 8211.61,5246.61 2.6@8335.12,5370.12
  Bottom Layer w30: v1(2323.86,5641.61) v1(2323.86,5881.38)
"LED GND 24": 2.7 Q24.1 | length 7795.8
  Top Layer w30: Q24.1@985.12,5881.38 v1(1339.61,5881.38) ; v1@1339.61,5640.12 1635.12,5640.12 1735.35,5539.88 2740.9,5539.88 2741.14,5540.12 3585.12,5540.12 3845.12,5280.12 6635.12,5280.12 6708.63,5206.61 8228.17,5206.61 8291.69,5270.12 2.7@8335.12,5270.12
  Bottom Layer w30: v1(1339.61,5641.61) v1(1339.61,5881.38)
"LED GND 25": 2.8 Q25.1 | length 561.9
  Top Layer w30: Q25.1@7879.88,4900.63 7939.88,4900.63 8205.86,5166.61 2.8@8331.61,5166.61
"LED GND 26": 2.9 Q26.1 | length 1999.7
  Top Layer w30: Q26.1@6890.63,4897.13 v1(7245.12,4897.13) ; v1@7245.12,4655.87 7543.93,4655.87 7602.68,4597.13 8014.64,4597.13 8195.12,4777.61 8195.12,4940.12 8325.12,5070.12 2.9@8335.12,5070.12
  Bottom Layer w30: v1(7245.12,4657.36) v1(7245.12,4897.13)
"LED GND 27": 2.10 Q27.1 | length 2944.4
  Top Layer w30: Q27.1@5906.38,4897.13 v1(6260.87,4897.13) ; v1@6260.87,4655.87 6561.18,4655.87 6659.92,4557.13 8031.21,4557.13 8240.12,4766.04 8240.12,4875.12 2.10@8335.12,4970.12
  Bottom Layer w30: v1(6260.87,4657.36) v1(6260.87,4897.13)
"LED GND 28": 2.11 Q28.1 | length 3894.9
  Top Layer w30: Q28.1@4922.13,4897.13 v1(5276.61,4897.13) ; v1@5276.61,4655.87 5575.43,4655.87 5635.67,4595.63 6564.85,4595.63 6643.35,4517.13 8047.78,4517.13 8280.12,4749.47 8280.12,4815.12 2.11@8335.12,4870.12
  Bottom Layer w30: v1(5276.61,4657.36) v1(5276.61,4897.13)
"LED GND 29": 2.12 Q29.1 | length 4942.8
  Top Layer w30: Q29.1@3937.87,4897.13 v1(4292.36,4897.13) ; v1@4292.36,4655.87 4591.18,4655.87 4691.42,4555.63 6548.28,4555.63 6626.78,4477.13 7207.82,4477.13 7340.97,4343.98 7459.27,4343.98 7590.92,4475.63 8062.85,4475.63 8340.12,4752.9 2.12@8340.12,4755.12
  Bottom Layer w30: v1(4292.36,4657.36) v1(4292.36,4897.13)
"LED GND 30": 2.13 Q30.1 | length 5924.5
  Top Layer w30: Q30.1@2953.62,4897.13 v1(3308.11,4897.13) ; v1@3308.11,4655.87 3606.93,4655.87 3666.77,4596.02 4594.45,4596.02 4674.85,4515.63 6531.71,4515.63 6610.21,4437.13 7191.25,4437.13 7324.4,4303.98 7475.84,4303.98 7607.49,4435.63 8110.63,4435.63 8335.12,4660.12 2.13@8335.12,4670.12
  Bottom Layer w30: v1(3308.11,4657.36) v1(3308.11,4897.13)
"LED GND 31": 2.14 Q31.1 | length 6894.6
  Top Layer w30: Q31.1@1969.37,4897.13 v1(2323.86,4897.13) ; v1@2323.86,4655.87 2619.37,4655.87 2719.21,4556.02 4577.88,4556.02 4658.28,4475.63 6515.14,4475.63 6593.65,4397.13 7174.68,4397.13 7307.83,4263.98 7492.41,4263.98 7624.06,4395.63 8160.63,4395.63 2.14@8335.12,4570.12
  Bottom Layer w30: v1(2323.86,4657.36) v1(2323.86,4897.13)
"LED GND 32": 2.15 Q32.1 | length 8211.6
  Top Layer w30: Q32.1@985.12,4897.13 v1(1339.61,4897.13) ; v1@1339.61,4655.87 1639.37,4655.87 1669.37,4625.87 ; 1669.37,4624.92 1778.27,4516.02 4561.32,4516.02 4641.71,4435.63 6498.57,4435.63 6577.08,4357.13 7158.11,4357.13 7291.26,4223.98 7508.98,4223.98 7640.63,4355.63 8198.41,4355.63 8412.9,4570.12 2.15@8635.12,4570.12
  Bottom Layer w30: v1(1339.61,4657.36) v1(1339.61,4897.13)
"LED GND 33": 3.28 Q33.1 | length 801.8
  Top Layer w30: Q33.1@7874.88,3909.88 8249.53,3909.88 8294.76,3955.12 8375.47,3955.12 8430.47,3900.12 3.28@8635.12,3900.12
"LED GND 34": 3.1 Q34.1 | length 1828.1
  Top Layer w30: Q34.1@6890.63,3912.87 v1(7245.12,3912.87) ; v1@7245.12,3670.12 7543.93,3670.12 7604.17,3609.88 8047.99,3609.88 3.1@8335.12,3897.01
  Bottom Layer w30: v1(7245.12,3673.11) v1(7245.12,3912.87)
"LED GND 35": 3.2 Q35.1 | length 2805.4
  Top Layer w30: Q35.1@5906.38,3912.87 v1(6260.87,3912.87) ; v1@6260.87,3670.12 6559.68,3670.12 6659.92,3569.88 8104.88,3569.88 3.2@8335.12,3800.12
  Bottom Layer w30: v1(6260.87,3673.11) v1(6260.87,3912.87)
"LED GND 36": 3.3 Q36.1 | length 3924.1
  Top Layer w30: Q36.1@4922.13,3912.87 v1(5276.61,3912.87) ; v1@5276.61,3670.12 5575.43,3670.12 5635.43,3610.12 5835.96,3610.12 5837.61,3611.77 6561.46,3611.77 6813.63,3359.6 6926.26,3359.6 6926.78,3360.12 7838.86,3360.12 7839.25,3359.72 7994.72,3359.72 3.3@8335.12,3700.12
  Bottom Layer w30: v1(5276.61,3673.11) v1(5276.61,3912.87)
"LED GND 37": 3.4 Q37.1 | length 4901.4
  Top Layer w30: Q37.1@3937.87,3912.87 v1(4292.36,3912.87) ; v1@4292.36,3670.12 4591.18,3670.12 4691.18,3570.12 4868.4,3570.12 4869.93,3571.65 4974.33,3571.65 4975.85,3570.12 5852.52,3570.12 5854.18,3571.77 6544.89,3571.77 6797.07,3319.6 6942.83,3319.6 6943.35,3320.12 7822.29,3320.12 7822.68,3319.72 8054.72,3319.72 3.4@8335.12,3600.12
  Bottom Layer w30: v1(4292.36,3673.11) v1(4292.36,3912.87)
"LED GND 38": 3.5 Q38.1 | length 5878.7
  Top Layer w30: Q38.1@2953.62,3912.87 v1(3308.11,3912.87) ; v1@3308.11,3670.12 3605.12,3670.12 3745.12,3530.12 3900.59,3530.12 3902.24,3531.77 3973.51,3531.77 3975.16,3530.12 4884.97,3530.12 4886.49,3531.65 4957.76,3531.65 4959.29,3530.12 5869.09,3530.12 5870.75,3531.77 6528.32,3531.77 6780.5,3279.6 6959.4,3279.6 6959.92,3280.12 7805.72,3280.12 7806.11,3279.72 8114.72,3279.72 3.5@8335.12,3500.12
  Bottom Layer w30: v1(3308.11,3673.11) v1(3308.11,3912.87)
"LED GND 39": 3.6 Q39.1 | length 6850.5
  Top Layer w30: Q39.1@1969.37,3912.87 v1(2323.86,3912.87) ; v1@2323.86,3670.12 2615.12,3670.12 2675.35,3609.88 2724.33,3609.88 ; 2724.57,3610.12 3605.12,3610.12 3865.12,3350.12 6653.41,3350.12 6763.93,3239.6 6975.97,3239.6 6976.49,3240.12 7789.15,3240.12 7789.54,3239.72 8136.59,3239.72 8296.98,3400.12 3.6@8335.12,3400.12
  Bottom Layer w30: v1(2323.86,3673.11) v1(2323.86,3912.87)
"LED GND 40": 3.7 Q40.1 | length 7826.8
  Top Layer w30: Q40.1@985.12,3912.87 v1(1339.61,3912.87) ; v1@1339.61,3670.12 1635.12,3670.12 1735.35,3569.88 2740.9,3569.88 2741.14,3570.12 3585.12,3570.12 3845.12,3310.12 6635.12,3310.12 6745.64,3199.6 6992.54,3199.6 6993.06,3200.12 7772.58,3200.12 7772.98,3199.72 8153.16,3199.72 8253.55,3300.12 3.7@8335.12,3300.12
  Bottom Layer w30: v1(1339.61,3673.11) v1(1339.61,3912.87)
"LED GND 41": 3.8 Q41.1 | length 561.9
  Top Layer w30: Q41.1@7879.88,2930.63 7945.63,2930.63 8211.61,3196.61 3.8@8331.61,3196.61